# EAGLE board PCBDesign (EAGLE 9.6.2)
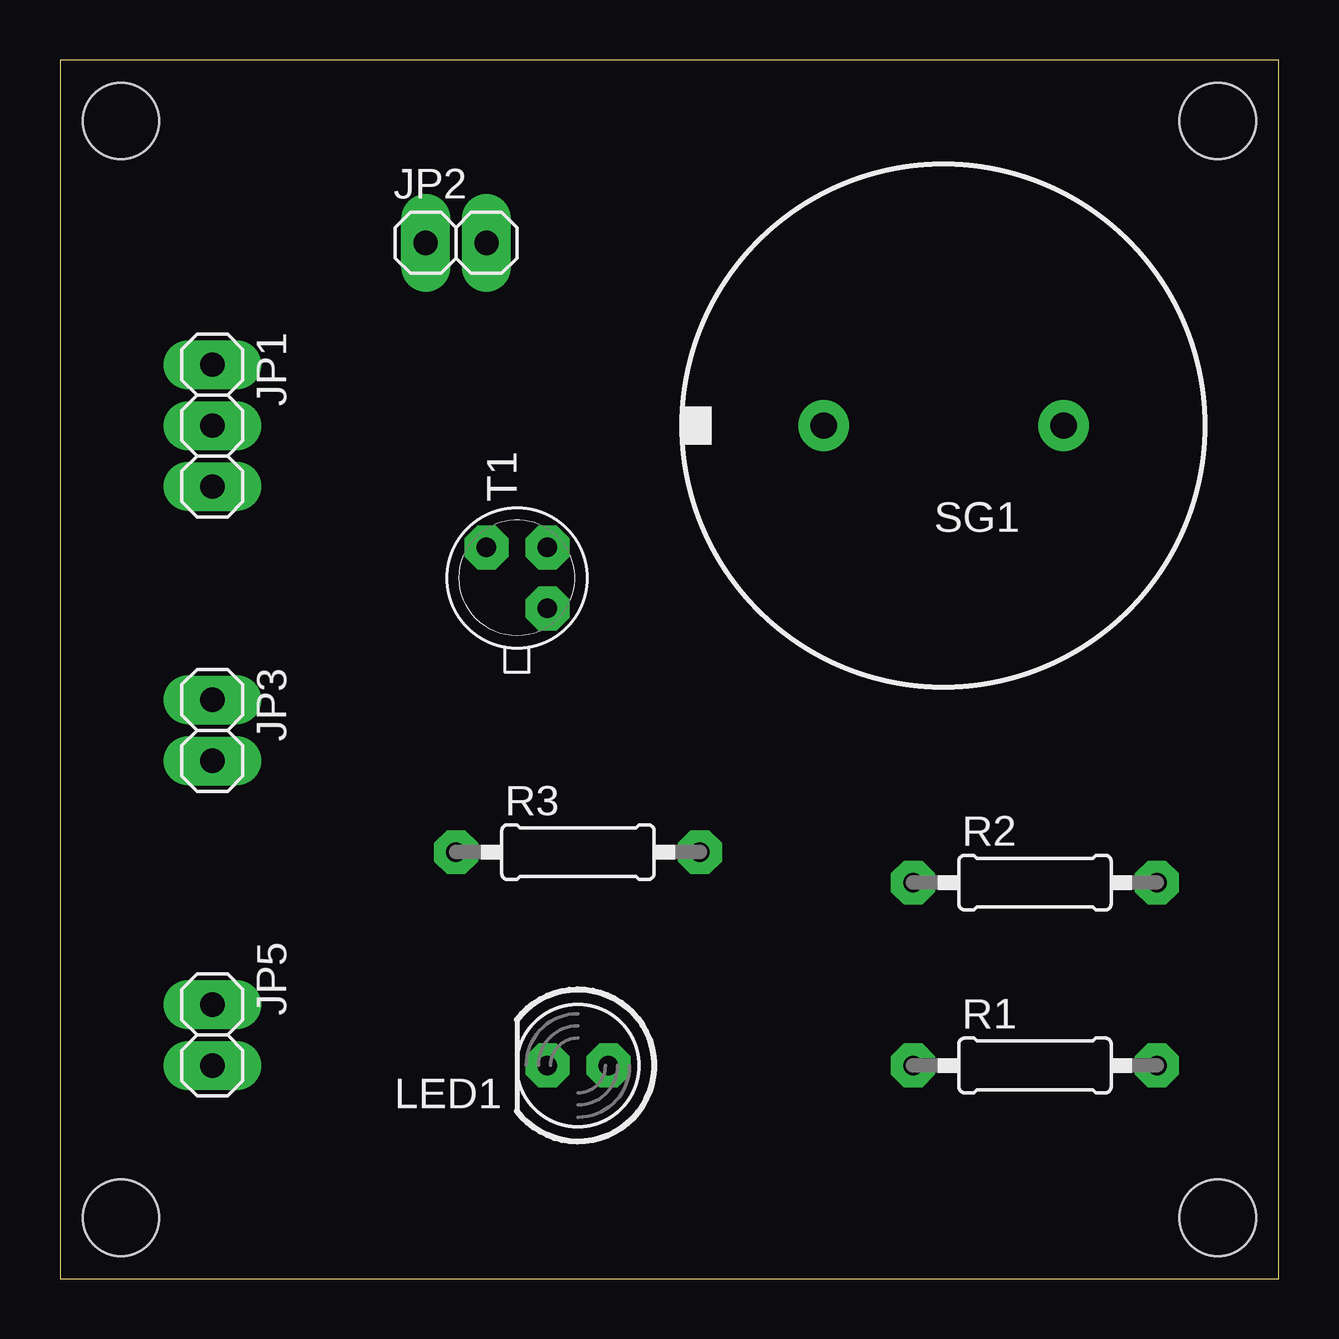
[diagram p0: board, top side]
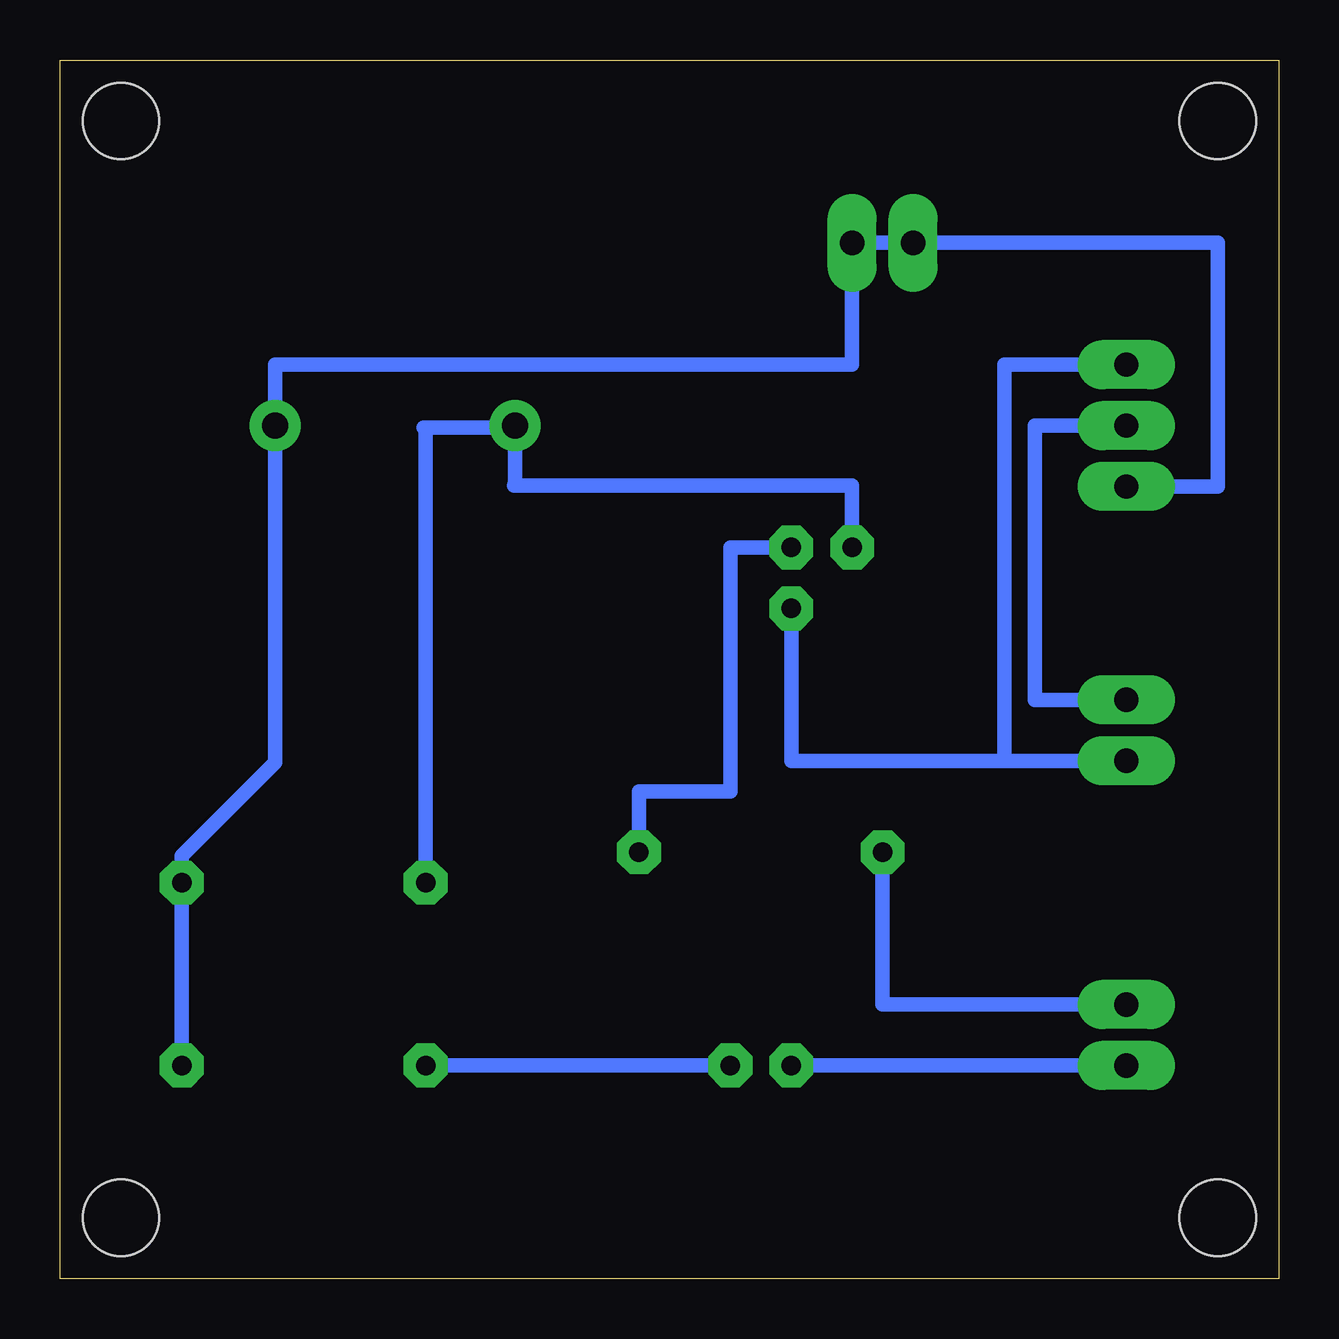
[diagram p1: board, bottom side, seen from below]

Size 50.8 x 50.8 mm. Coordinates in mm from the lower left corner, seen from the top.
Outline: 0,0 50.8,0 50.8,50.8 0,50.8 0,0
Copper layers (1*16): Top 0.035mm / dielectric 1.5mm / Bottom 0.035mm
Design rules "default *": minimum track width 24mil, minimum drill 0.6mm, track to track 14mil, track to pad 14mil, pad to pad 14mil, via to via 14mil, smd to smd 6mil, copper to edge 40mil, drill to drill 6mil, minimum pad ring 20mil, minimum via ring 8mil, stop-mask expansion 4mil, vias tented up to drill 0mil, thermal gap 10mil
Holes 3.17 mm at 2.54,48.26 48.26,48.26 48.26,2.54 2.54,2.54

## Footprints (pad centres in the part's own frame; a part is rotated, then mirrored left to right if it is on the bottom)
1X03 = drill 1.016 long: 1 -2.54,0; 2 0,0; 3 2.54,0
1X02 = drill 1.016 long: 1 -1.27,0; 2 1.27,0
LED5MM = drill 0.813 octagon: A -1.27,0; K 1.27,0
0207/10 = drill 0.813 octagon: 1 -5.08,0; 2 5.08,0
EFBRD22C41 = drill 1.1 pad 1.676: 1 -5,0; 2 5,0
TO18 = drill 0.813 octagon: 1 -1.27,-1.27; 2 1.27,-1.27; 3 1.27,1.27

## Placement (x,y rotation side)
JP1  [1X03]  6.35,35.56 270 top
JP2  [1X02]  16.51,43.18 0 top
JP3  [1X02]  6.35,22.86 270 top
JP5  [1X02]  6.35,10.16 270 top
LED1  [LED5MM]  21.59,8.89 180 top
R1  [0207/10]  40.64,8.89 0 top
R2  [0207/10]  40.64,16.51 0 top
R3  [0207/10]  21.59,17.78 0 top
SG1  EFBRD22C41  [EFBRD22C41]  36.83,35.56 180 top
T1  2N2222  [TO18]  19.05,29.21 90 top

## Library data of the parts
JP1-JP3 JP5 = pinhead
LED1 = led
R1-R3 = rcl; SPICEPREFIX: R
SG1 = buzzer; OC_FARNELL: unknown; OC_NEWARK: unknown
T1 = transistor

## Nets
N$1: LED1.A R1.1
N$2: JP1.3 JP2.1 JP2.2 R1.2 R2.2 SG1.1
N$3: JP5.2 LED1.K
N$4: R3.2 T1.2
N$5: R2.1 SG1.2 T1.3
N$6: JP5.1 R3.1
N$7: JP1.1 JP3.2 T1.1
N$8: JP1.2 JP3.1

## Tracks (layer width: path | path; a pad name or v marks a point on that pad's centre or on a via)
N$1
  Bottom 0.61: R1.1 LED1.A
N$2
  Bottom 0.61: JP1.3 2.54,33.02 2.54,43.18 JP2.1 JP2.2 17.78,38.1 41.83,38.1 SG1.1 41.83,21.51 45.72,17.62 R2.2 R1.2
N$3
  Bottom 0.61: LED1.K JP5.2
N$4
  Bottom 0.61: T1.2 22.86,30.48 22.86,20.32 26.67,20.32 R3.2
N$5
  Bottom 0.61: T1.3 17.78,33.07 31.88,33.07 31.83,33.12 SG1.2 31.91,35.48 35.64,35.48 35.56,35.4 R2.1
N$6
  Bottom 0.61: R3.1 16.51,11.43 JP5.1
N$7
  Bottom 0.61: JP1.1 11.43,38.1 11.43,21.59 | JP3.2 11.43,21.59 | T1.1 20.32,21.59 11.43,21.59
N$8
  Bottom 0.61: JP1.2 10.16,35.56 10.16,24.13 JP3.1